# EAGLE board gd_new_combo (EAGLE 7.2.0)
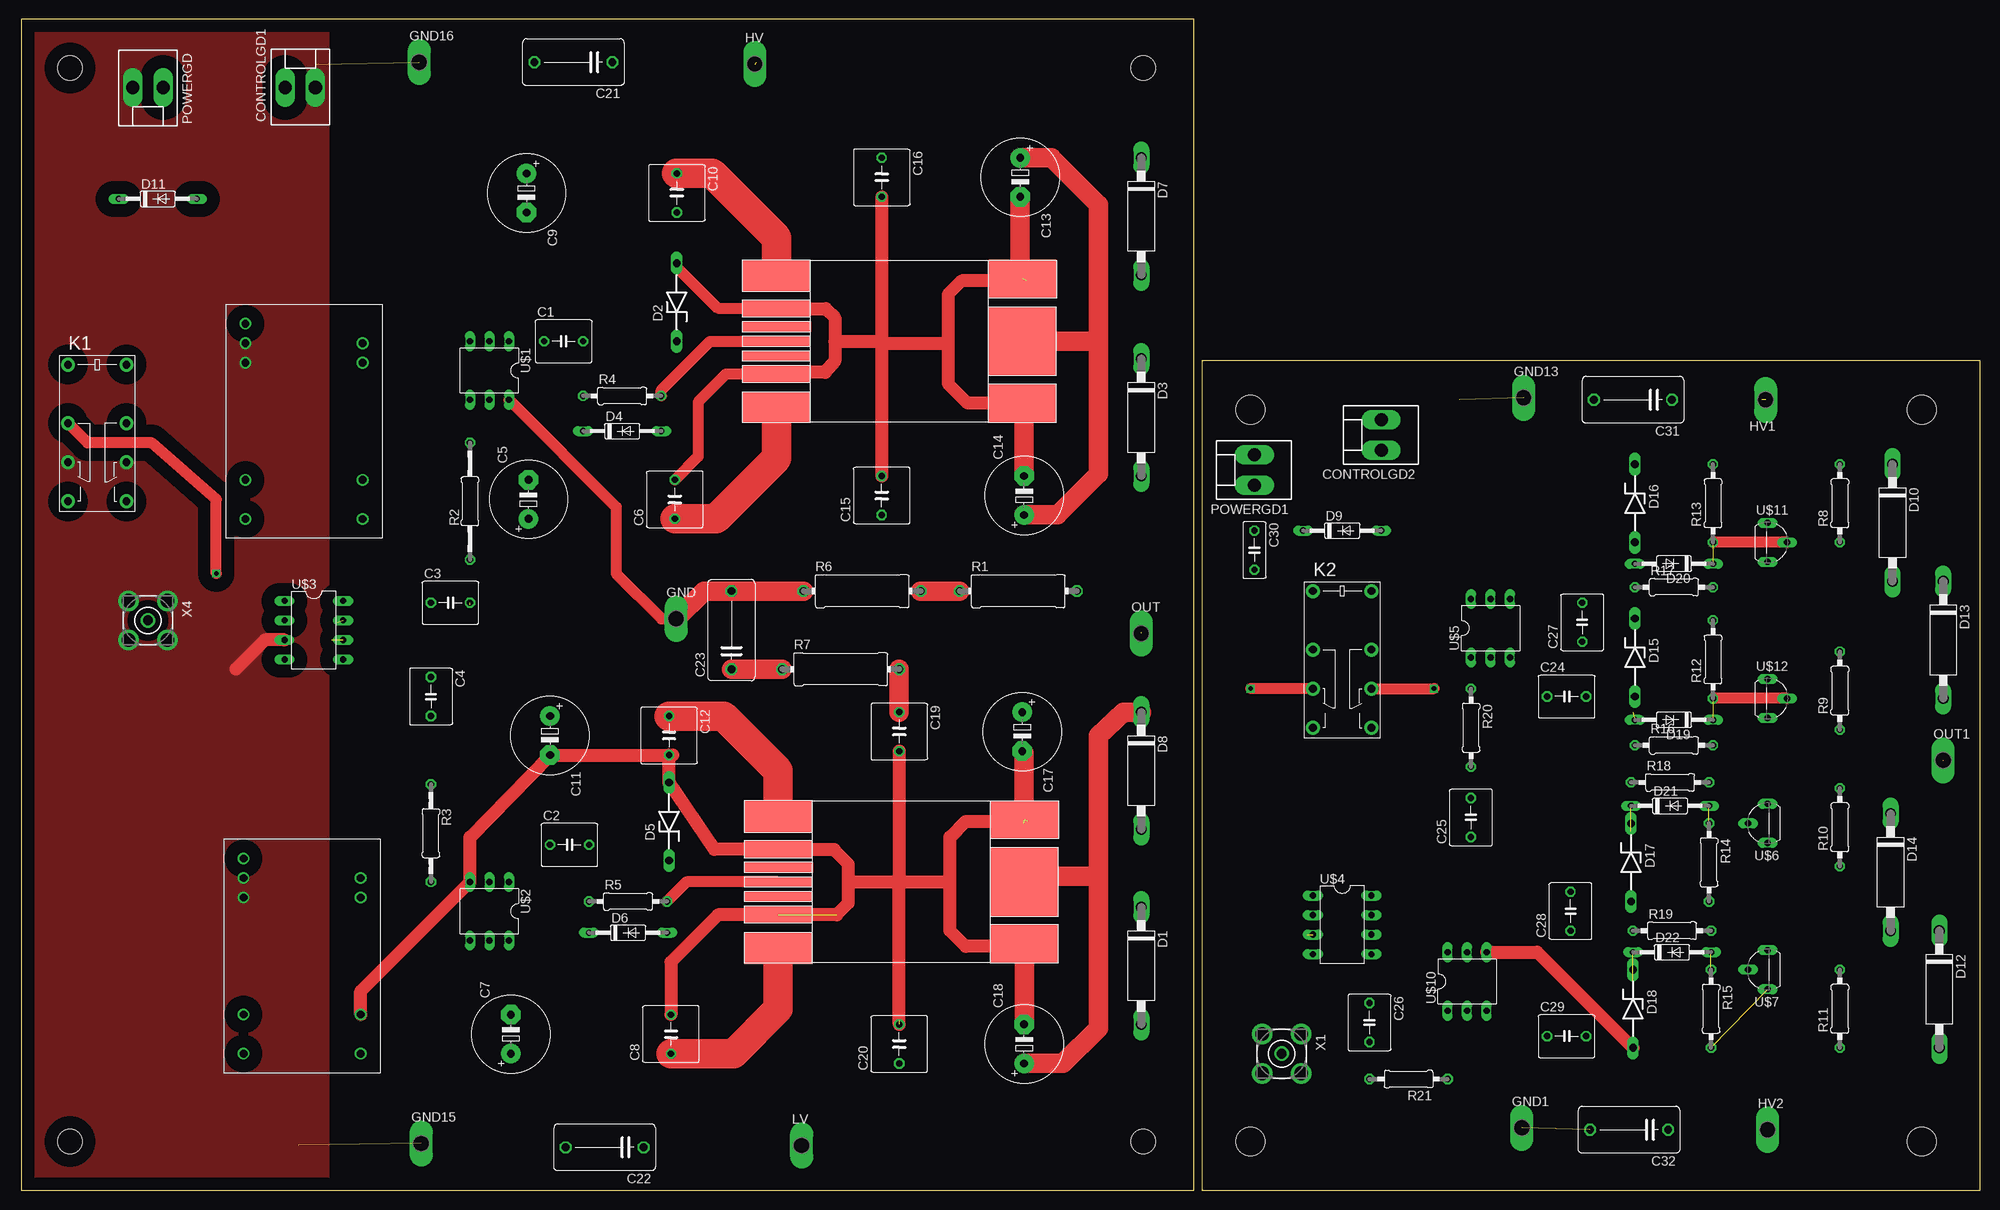
[diagram p0: board, top side]
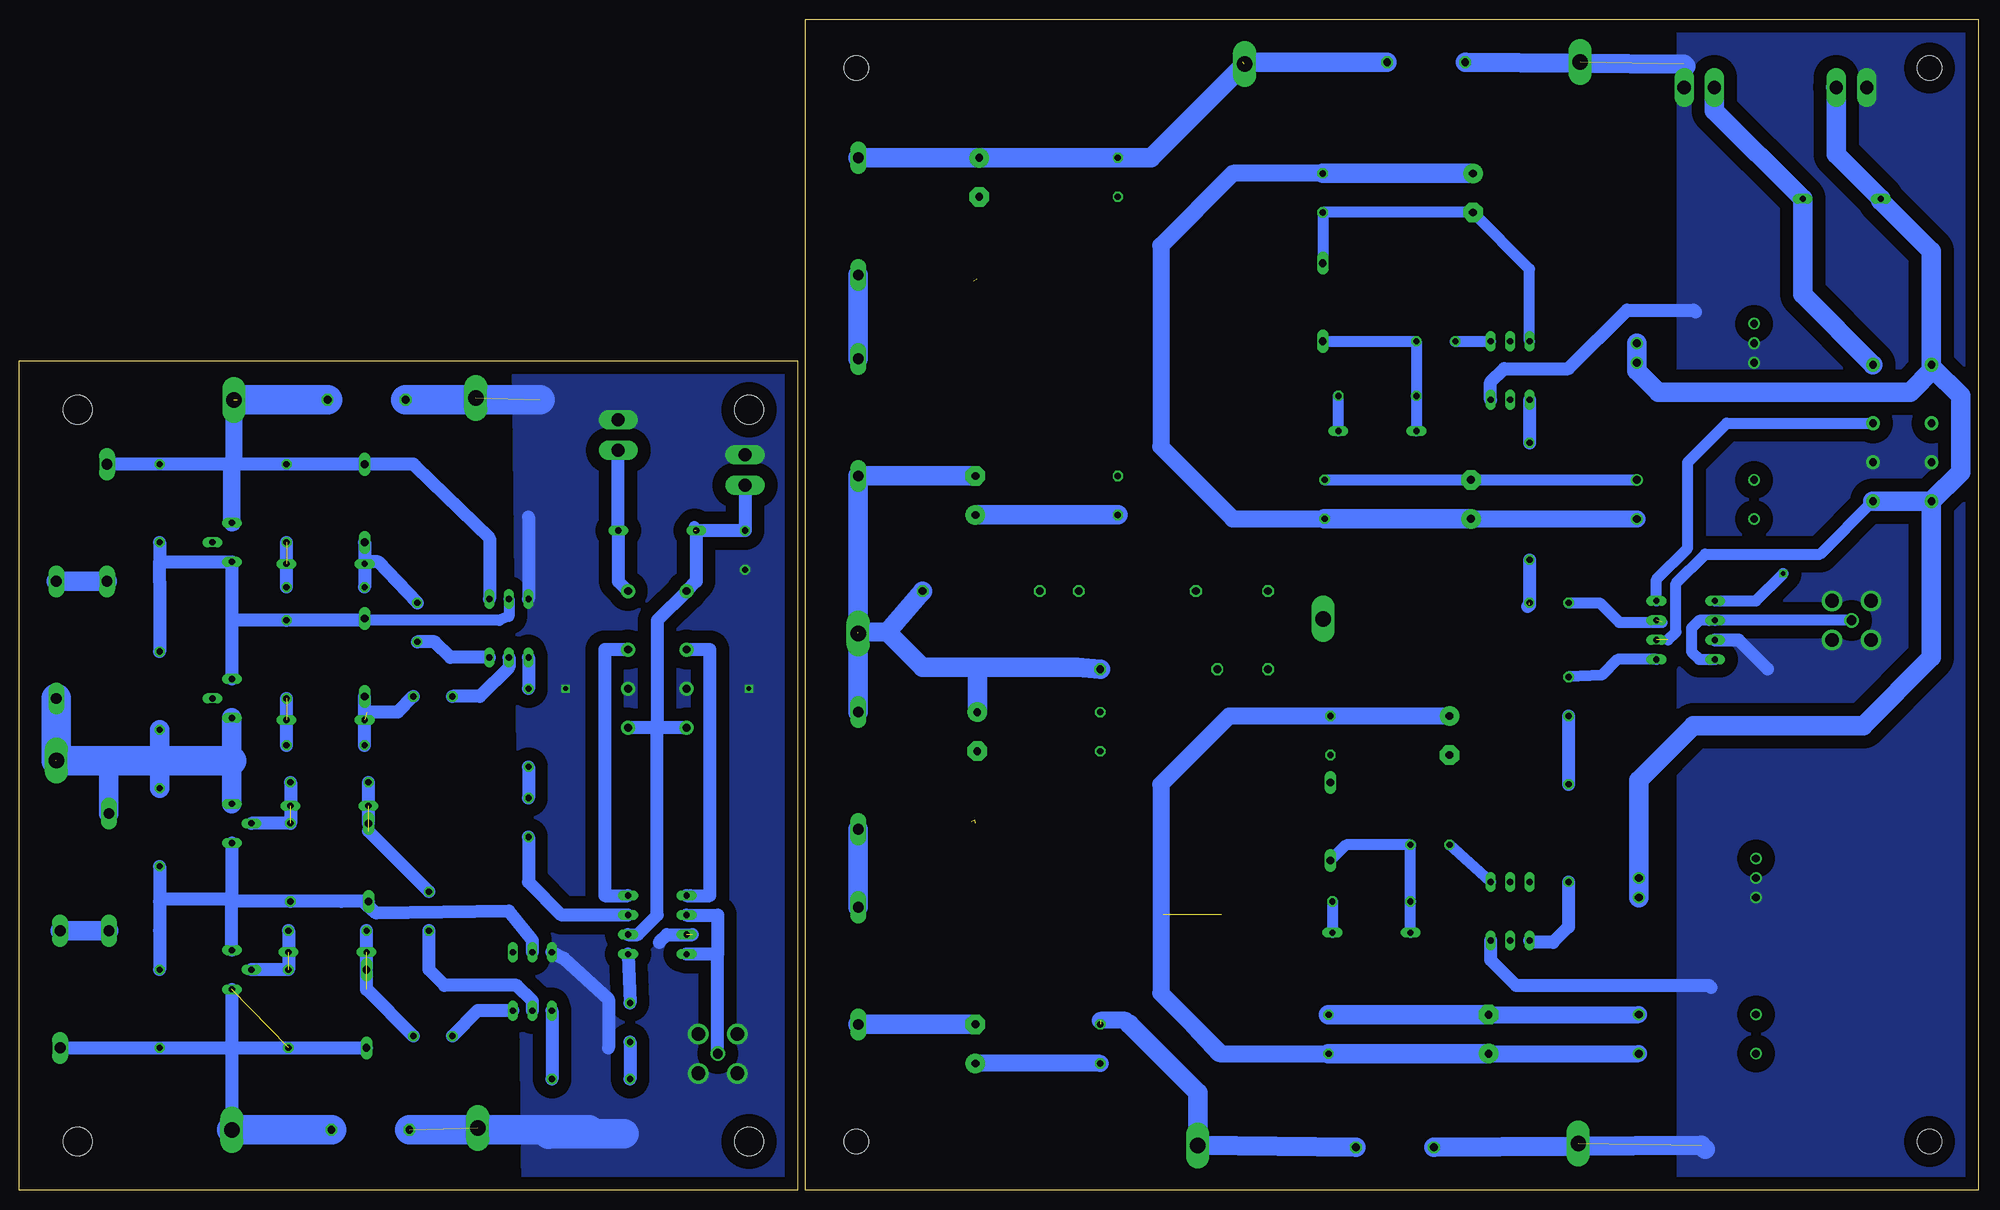
[diagram p1: board, bottom side, seen from below]

Size 255.02 x 152.4 mm. Coordinates in mm from the lower left corner, seen from the top.
Outline: 0,0 152.65,0 152.65,152.4 0,152.4 0,0
Outline: 153.67,0 255.02,0 255.02,107.95 153.67,107.95 153.67,0
Copper layers (1*16): Top 0.035mm / dielectric 1.5mm / Bottom 0.035mm
Design rules "default": minimum track width 10mil, minimum drill 24mil, track to track 8mil, track to pad 8mil, pad to pad 8mil, via to via 8mil, smd to smd 8mil, copper to edge 40mil, drill to drill 8mil, minimum pad ring 10mil, minimum via ring 8mil, stop-mask expansion 4mil, vias tented up to drill 0mil, thermal gap 10mil
Holes 3.2 mm at 146.05,146.05 146.05,6.35 6.35,6.35 6.35,146.05 146.05,146.05 146.05,6.35 6.35,6.35 6.35,146.05
Holes 3.8 mm at 247.4,101.6 247.4,6.35 160.02,6.35 160.02,101.6 247.4,101.6 247.4,6.35 160.02,6.35 160.02,101.6

## Footprints (pad centres in the part's own frame; a part is rotated, then mirrored left to right if it is on the bottom)
C050-055X075 = drill 0.813 octagon: 1 -2.54,0; 2 2.54,0
E5-10,5 = drill 1.016 pad 2.54: + -2.54,0 | drill 1.016 pad 2.54 octagon: - 2.54,0
C050-075X075 = drill 0.813 octagon: 1 -2.54,0; 2 2.54,0
C102-064X133 = drill 1.016 octagon: 1 -5.08,0; 2 5.08,0
C050-030X075 = drill 0.813 octagon: 1 -2.54,0; 2 2.54,0
KK-156-2 = drill 1.7 pad 2.184 long: 1 -1.98,0; 2 1.98,0
C1702-15 = drill 1.397 long: A 7.62,0; C -7.62,0
ZDIO-10 = drill 1 long: A 5.08,0; C -5.08,0
DO35-10 = drill 0.813 long: A 5.08,0; C -5.08,0
NCS = drill 1: P$1 0,0; P$2 2.54,0; P$3 5.08,0; P$4 20.32,0; P$5 25.4,0; P$6 25.4,15.24; P$7 20.32,15.24; P$8 5.08,15.24; P$9 2.54,15.24
P1-20Y = drill 2.007 pad 2.54 long: TP 0,0
G5V-2 = drill 1 pad 1.8: 1 -8.89,-3.81; 4 -1.27,-3.81; 6 3.81,-3.81; 8 8.89,-3.81; 9 8.89,3.81; 11 3.81,3.81; 13 -1.27,3.81; 16 -8.89,3.81
0414/15 = drill 1.016 octagon: 1 -7.62,0; 2 7.62,0
0207/15 = drill 0.813 octagon: 1 -7.62,0; 2 7.62,0
0207/12 = drill 0.813 octagon: 1 -6.35,0; 2 6.35,0
0207/10 = drill 0.813 octagon: 1 -5.08,0; 2 5.08,0
DIL06 = drill 0.813 long: 1 -2.54,-3.81; 2 0,-3.81; 3 2.54,-3.81; 4 2.54,3.81; 5 0,3.81; 6 -2.54,3.81
DIL08 = drill 0.813 long: 1 -3.81,-3.81; 2 -1.27,-3.81; 3 1.27,-3.81; 4 3.81,-3.81; 5 3.81,3.81; 6 1.27,3.81; 7 -1.27,3.81; 8 -3.81,3.81
TO92L = drill 0.813 long: 1 0,-2.54; 2 2.54,0; 3 0,2.54
IXZ631DF12N100 = smd 8.89 x 4.064: P$1 -16.002,8.534; P$7 -15.977,-8.585 | smd 8.89 x 2.159: P$2 -15.977,4.242; P$6 -16.027,-4.293 | smd 8.89 x 1.27: P$3 -15.951,1.88; P$4 -16.078,0; P$5 -16.027,-1.854 | smd 8.89 x 4.953: P$8 16.053,-8.052; P$10 16.053,8.103 | smd 8.89 x 8.89: P$9 16.015,-0.013
BU-SMA-V = drill 1.27: 1 0,0 | drill 1.778: 2 -2.55,2.55; 3 2.55,2.55; 4 2.55,-2.55; 5 -2.55,-2.55

## Placement (x,y rotation side)
C1  [C050-055X075]  70.61,110.49 0 top
C2  [C050-055X075]  71.37,44.96 0 top
C3  [C050-055X075]  55.88,76.45 0 top
C4  [C050-055X075]  53.34,64.26 270 top
C5  [E5-10,5]  66.04,89.92 90 top
C6  [C050-075X075]  85.09,89.92 90 top
C7  [E5-10,5]  63.75,20.32 90 top
C8  [C050-075X075]  84.58,20.32 90 top
C9  [E5-10,5]  65.79,129.79 270 top
C10  [C050-075X075]  85.34,129.79 270 top
C11  [E5-10,5]  68.83,59.18 270 top
C12  [C050-075X075]  84.33,59.18 270 top
C13  [E5-10,5]  130.05,131.83 270 top
C14  [E5-10,5]  130.56,90.42 90 top
C15  [C050-075X075]  112.01,90.42 90 top
C16  [C050-075X075]  112.01,131.83 270 top
C17  [E5-10,5]  130.3,59.69 270 top
C18  [E5-10,5]  130.56,19.05 90 top
C19  [C050-075X075]  114.3,59.69 270 top
C20  [C050-075X075]  114.3,19.05 90 top
C21  [C102-064X133]  71.88,146.81 180 top
C22  [C102-064X133]  75.95,5.59 180 top
C23  [C102-064X133]  92.46,72.9 90 top
C24  .22u  [C050-055X075]  201.17,64.26 0 top
C25  .22u  [C050-055X075]  188.72,48.51 90 top
C26  .22u  [C050-055X075]  175.51,21.84 270 top
C27  .22u  [C050-055X075]  203.2,73.91 90 top
C28  .22u  [C050-055X075]  201.68,36.32 90 top
C29  .22u  [C050-055X075]  201.17,20.07 0 top
C30  [C050-030X075]  160.53,83.31 270 top
C31  10p  [C102-064X133]  209.8,102.87 180 top
C32  10p  [C102-064X133]  209.3,7.87 180 top
CONTROLGD1  [KK-156-2]  36.32,143.51 0 top
CONTROLGD2  [KK-156-2]  177.04,98.3 90 top
D1  P6KEXXA  [C1702-15]  145.8,29.21 270 top
D2  4742  [ZDIO-10]  85.34,115.57 90 top
D3  P6KEXXA  [C1702-15]  145.8,100.58 270 top
D4  1N4148DO35-10  [DO35-10]  78.23,98.81 0 top
D5  4742  [ZDIO-10]  84.33,48.01 90 top
D6  1N4148DO35-10  [DO35-10]  78.99,33.53 0 top
D7  P6KEXXA  [C1702-15]  145.8,126.75 270 top
D8  P6KEXXA  [C1702-15]  145.8,54.61 270 top
D9  1N4148DO35-10  [DO35-10]  171.96,85.85 0 top
D10  P6KEXXA  [C1702-15]  243.59,86.87 270 top
D11  1N4148DO35-10  [DO35-10]  17.78,129.03 0 top
D12  P6KEXXA  [C1702-15]  249.68,26.16 270 top
D13  P6KEXXA  [C1702-15]  250.19,71.63 270 top
D14  P6KEXXA  [C1702-15]  243.33,41.4 270 top
D15  4742  [ZDIO-10]  210.06,69.34 270 top
D16  4742  [ZDIO-10]  210.06,89.41 270 top
D17  4742  [ZDIO-10]  209.55,42.67 270 top
D18  4742  [ZDIO-10]  209.8,23.62 270 top
D19  1N4148DO35-10  [DO35-10]  215.14,61.21 180 top
D20  1N4148DO35-10  [DO35-10]  215.14,81.53 180 top
D21  1N4148DO35-10  [DO35-10]  214.63,50.04 0 top
D22  1N4148DO35-10  [DO35-10]  214.88,30.99 0 top
DC1  [NCS]  29.21,112.78 270 top
DC2  [NCS]  28.96,43.18 270 top
GND  TPPAD1-20Y  [P1-20Y]  85.27,74.37 0 top
GND1  TPPAD1-20Y  [P1-20Y]  195.33,8.13 0 top
GND13  TPPAD1-20Y  [P1-20Y]  195.58,103.12 0 top
GND15  TPPAD1-20Y  [P1-20Y]  52.07,6.1 0 top
GND16  TPPAD1-20Y  [P1-20Y]  51.82,146.81 0 top
HV  TPPAD1-20Y  [P1-20Y]  95.5,146.56 0 top
HV1  TPPAD1-20Y  [P1-20Y]  227.08,102.87 180 top
HV2  TPPAD1-20Y  [P1-20Y]  227.33,7.87 0 top
K1  G5V-2  [G5V-2]  9.91,98.55 270 top
K2  G5V-2  [G5V-2]  171.96,69.09 270 top
LV  TPPAD1-20Y  [P1-20Y]  101.6,5.84 0 top
OUT  TPPAD1-20Y  [P1-20Y]  145.8,72.47 0 top
OUT1  TPPAD1-20Y  [P1-20Y]  250.19,55.96 0 top
POWERGD  [KK-156-2]  16.51,143.51 180 top
POWERGD1  [KK-156-2]  160.53,93.73 90 top
R1  [0414/15]  129.79,77.98 0 top
R2  [0207/15]  58.42,89.66 90 top
R3  [0207/12]  53.34,46.48 270 top
R4  [0207/10]  78.23,103.38 0 top
R5  [0207/10]  78.99,37.59 0 top
R6  [0414/15]  109.47,77.98 0 top
R7  [0414/15]  106.68,67.82 0 top
R8  1M  [0207/10]  236.73,89.41 90 top
R9  1M  [0207/10]  236.73,65.02 90 top
R10  1M  [0207/10]  236.73,47.24 90 top
R11  1M  [0207/10]  236.73,23.62 90 top
R12  50k  [0207/10]  220.22,69.09 90 top
R13  50k  [0207/10]  220.22,89.41 90 top
R14  50k  [0207/10]  219.71,42.67 270 top
R15  50k  [0207/10]  219.96,23.62 270 top
R16  70  [0207/10]  215.14,57.91 0 top
R17  70  [0207/10]  215.14,78.49 0 top
R18  70  [0207/10]  214.63,53.09 0 top
R19  70  [0207/10]  214.88,33.78 0 top
R20  70  [0207/10]  188.72,60.2 270 top
R21  1M  [0207/10]  180.59,14.48 180 top
U$1  DA-2319  [DIL06]  60.96,106.68 180 top
U$2  DA-2319  [DIL06]  60.96,36.32 180 top
U$3  UCC27425  [DIL08]  38.1,72.9 270 top
U$4  UCC27425  [DIL08]  171.96,34.54 270 top
U$5  DA-2320  [DIL06]  191.26,73.15 0 top
U$6  VN0550L  [TO92L]  227.33,47.75 180 top
U$7  VN0550L  [TO92L]  227.33,28.7 180 top
U$8  IXZ631DF12N100  [IXZ631DF12N100]  114.3,110.49 0 top
U$9  IXZ631DF12N100  [IXZ631DF12N100]  114.55,40.13 0 top
U$10  DA-2320  [DIL06]  188.21,27.18 0 top
U$11  VP0550L  [TO92L]  227.33,84.33 0 top
U$12  VP0550L  [TO92L]  227.33,64.01 0 top
X1  BU-SMA-V  [BU-SMA-V]  164.08,17.78 270 top
X4  BU-SMA-V  [BU-SMA-V]  16.51,74.17 270 top

## Library data of the parts
C1-C4 C6 C8 C10 C12 C15 C16 C19 C20 C24-C29 C31 C32 R1-R7 = resistor
C5 C7 C9 C11 C13 C14 C17 C18 C21-C23 C30 R8-R21 = rcl
CONTROLGD1 CONTROLGD2 POWERGD POWERGD1 = con-molex; OC_FARNELL: unknown; OC_NEWARK: unknown
D1-D22 = diode
DC1 DC2 = dc-dc-converter
GND GND1 GND13 GND15 GND16 HV HV1 HV2 LV OUT OUT1 = testpad
K1 K2 = relay; MPN: G5V-2 5DC; OC_FARNELL: 9949488; OC_NEWARK: 78K5703
U$1 U$2 U$5 U$10 = trafo
U$3 U$4 = texas
U$6 U$7 U$11 U$12 = transistor-fet
U$8 U$9 = hvsw
X1 X4 = con-coax; OC_FARNELL: unknown; OC_NEWARK: unknown

## Nets
+12V: D11.C DC1.P$8 DC1.P$9 DC2.P$8 DC2.P$9 K1.1 K1.8 K1.9 POWERGD.1 U$3.6
+15V: C30.1 D9.C K2.1 K2.8 K2.9 POWERGD1.1 U$4.6
ENSW: CONTROLGD1.1 D11.A K1.16
ENSW1: CONTROLGD2.1 D9.A K2.16
GD_HI: D4.A R4.2 U$8.P$4
GD_LO: D6.A R5.2 U$9.P$4
GND: C21.2 C22.2 C23.2 CONTROLGD1.2 DC1.P$2 DC1.P$3 DC2.P$2 DC2.P$3 GND15.TP GND16.TP GND.TP K1.6 K1.11 POWERGD.2 R6.1 U$1.6 U$2.6 U$3.3 X4.2 X4.3 X4.4 X4.5
GND2: C30.2 C31.2 C32.2 CONTROLGD2.2 GND1.TP GND13.TP K2.6 K2.11 POWERGD1.2 U$4.3 U$5.6 U$10.6 X1.2 X1.3 X1.4 X1.5
N$1: U$3.2 U$3.4 X4.1
N$2: C3.1 U$3.7
N$3: R2.2 U$1.4
N$4: C4.1 U$3.5
N$5: R3.2 U$2.4
N$6: C4.2 R3.1
N$7: C5.+ C6.1 C9.+ C10.1 DC1.P$6 U$8.P$1 U$8.P$7
N$8: C7.+ C8.1 C11.+ C12.1 DC2.P$6 U$9.P$1 U$9.P$7
N$9: D3.C D7.A
N$10: C1.1 U$1.1
N$11: C2.1 U$2.1
N$12: R1.1 R6.2
N$13: C23.1 R7.1
N$14: K1.4 U$3.1
N$15: K1.13 U$3.8
N$16: C3.2 R2.1
N$17: C13.+ C14.+ C15.1 C16.1 C21.1 D7.C HV.TP U$8.P$9
N$18: D1.C D8.A
N$19: C7.- C8.2 C11.- C12.2 C17.- C18.- C19.2 C20.2 C22.1 D1.A D5.A DC2.P$7 LV.TP U$2.3 U$9.P$2 U$9.P$6 U$9.P$8 U$9.P$10
N$20: C1.2 D2.C D4.C R4.1
N$21: C2.2 D5.C D6.C R5.1
N$22: U$4.2 U$4.4 X1.1
N$23: C25.1 U$4.7
N$24: C26.1 U$4.5
N$25: K2.4 U$4.1
N$26: K2.13 U$4.8
N$27: C24.1 U$5.2
N$28: C27.1 U$5.3
N$29: C28.1 U$10.2
N$30: C29.1 U$10.3
N$32: C28.2 D17.C D21.C R18.1
N$33: C29.2 D18.C D22.C R19.1
N$35: C27.2 D16.A D20.A R17.1
N$36: C31.1 D10.C D16.C HV1.TP R8.2 R13.2 U$5.4 U$11.3
N$37: D13.A D14.C OUT1.TP R9.1 R10.2 U$6.1 U$12.1
N$38: U$10.5
N$40: D17.A R10.1 R11.2 R14.2 U$6.3 U$7.1
N$41: D15.C R8.1 R9.2 R12.2 U$5.5 U$11.1 U$12.3
N$43: D19.C R12.1 R16.2 U$12.2
N$44: C24.2 D15.A D19.A R16.1
N$45: D22.A R15.1 R19.2 U$7.2
N$46: D20.C R13.1 R17.2 U$11.2
N$47: R20.1 U$5.1
N$48: R21.1 U$10.1
N$49: C25.2 R20.2
N$50: C26.2 R21.2
N$51: C32.1 D12.A D18.A HV2.TP R11.1 R15.2 U$7.3 U$10.4
N$52: D10.A D13.C
N$53: D12.C D14.A
N$251: D21.A R14.1 R18.2 U$6.2
OUT: C5.- C6.2 C9.- C10.2 C13.- C14.- C15.2 C16.2 C17.+ C18.+ C19.1 C20.1 D2.A D3.A D8.C DC1.P$7 OUT.TP R1.2 R7.2 U$1.3 U$8.P$2 U$8.P$6 U$8.P$8 U$8.P$10 U$9.P$9

## Tracks (layer width: path | path; a pad name or v marks a point on that pad's centre or on a via)
+12V  (1 unrouted)
  Bottom 1.422: 40.39,71.63 39.37,72.64 39.37,78.99 35.56,82.8 20.57,82.8 K1.9
  Bottom 2.54: 5.84,106.93 6.1,107.19 K1.1 6.1,122.17 12.7,128.78 D11.C 18.49,134.82 POWERGD.1 18.54,143.56 | 5.84,106.93 2.29,103.38 2.29,93.47 K1.8 | K1.8 K1.9 | DC1.P$9 DC1.P$8 44.45,106.68 41.66,103.89 8.89,103.89 5.84,106.93 | DC2.P$8 DC2.P$9 44.2,53.34 37.08,60.45 14.99,60.45 6.1,69.34 K1.8
+15V  (1 unrouted)
  Bottom 1.422: 167.13,85.85 167.13,86.36
  Bottom 1.676: D9.C 166.88,79.25 K2.1 171.96,74.17 171.96,60.2 | 171.96,60.2 171.96,35.81 174.5,33.27 U$4.6 | 171.96,60.2 K2.9 | K2.8 171.96,60.2 | POWERGD1.1 C30.1 167.13,85.85
ENSW
  Bottom 2.54: CONTROLGD1.1 34.34,140.51 D11.A 22.86,116.59 K1.16
ENSW1
  Bottom 1.676: CONTROLGD2.1 D9.A 177.04,79.25 K2.16
GD_HI
  Top 1.422: R4.2 83.31,104.14 89.66,110.49 U$8.P$4
  Bottom 1.422: D4.A R4.2
GD_LO
  Top 1.422: U$9.P$4 86.61,40.13 R5.2
  Bottom 1.422: R5.2 D6.A
GND  (2 unrouted)
  Top 1.422: U$1.6 77.47,88.9 77.47,80.26 83.36,74.37 GND.TP
  Top 1.676: U$3.3 31.75,71.63 27.94,67.82
  Top 2.54: GND.TP 88.88,77.98 C23.2 R6.1
  Bottom 1.676: U$2.6 63.5,29.97 60.2,26.67 35.05,26.67 34.8,26.42 | U$3.3 31.24,71.63 27.43,67.82 | U$1.6 63.5,105.16 61.72,106.93 53.34,106.93 45.72,114.55 37.08,114.55 36.83,114.3
  Bottom 2.54: C21.2 38.35,146.56 38.1,146.3 | C22.2 36.07,5.84 35.56,5.33
  pour Bottom (isolate 1.676, no thermals): 0.25,152.4 39.12,152.15 39.12,-0.25 0.25,0
  pour Top (isolate 1.676, no thermals): 0.25,152.15 39.88,151.89 39.88,-0.25 0.25,0
GND2  (via drill 0.6)  (3 unrouted)
  Top 1.422: K2.11 v183.9,65.28 | K2.6 v160.02,65.28
  Bottom 1.676: 188.72,87.63 U$5.6 | U$10.6 184.15,30.23 178.31,24.89 178.31,18.54 | 171.7,32.26 170.69,33.27 167.39,33.27
  Bottom 3.81: 186.13,7.32 180.85,7.34 | 180.85,7.34 176.28,7.37 | C31.2 187.2,102.87 | C32.2 180.85,7.87 180.85,7.34
  pour Bottom (isolate 1.676, no thermals): 153.92,107.7 190.75,107.7 189.48,0 153.92,0
N$1
  Bottom 1.422: X4.1 U$3.2 | U$3.2 35.05,74.17 | U$3.2 36.32,74.17 37.34,73.15 37.34,70.1 36.32,69.09 U$3.4
N$2  (1 unrouted)
  Bottom 1.422: C3.1 49.28,76.45 46.74,73.91 41.15,73.91
N$3
  Bottom 1.676: U$1.4 R2.2
N$4
  Bottom 1.422: U$3.5 46.99,69.09 49.02,67.06 C4.1
N$5
  Bottom 1.676: R3.2 53.34,34.29 55.37,32.26 58.17,32.26 U$2.4
N$6
  Bottom 1.676: C4.2 R3.1
N$7
  Top 3.81: C6.1 90.42,87.38 98.3,95.25 98.3,101.88 U$8.P$7 | U$8.P$1 98.3,123.95 89.92,132.33 C10.1
  Bottom 2.184: C5.+ DC1.P$6 | C10.1 97.03,132.33 106.43,122.94 106.43,96.77 97.03,87.38 84.07,87.38
  Bottom 2.54: C9.+ C10.1 | C5.+ 84.07,87.38 C6.1
N$8
  Top 3.81: C8.1 92.71,17.78 98.55,23.62 98.55,31.52 U$9.P$7 | U$9.P$1 98.55,54.61 91.44,61.72 C12.1
  Bottom 2.184: C11.+ C12.1 97.54,61.72 106.43,52.83 106.43,25.65 102.11,21.34 | C7.+ DC2.P$6 | 98.81,18.03 102.11,21.34 | 102.11,21.34 98.81,17.78 84.07,17.78
  Bottom 2.54: C8.1 84.07,17.78 C7.+
N$9
  Bottom 2.54: D7.A D3.C
N$10
  Bottom 1.422: C1.1 U$1.1
N$11
  Bottom 1.422: U$2.1 C2.1
N$12
  Top 2.54: R6.2 R1.1
N$13
  Top 2.54: C23.1 R7.1
N$14  (via drill 0.6)
  Top 1.422: v25.4,80.26 25.4,89.92 17.02,97.28 8.64,97.28 K1.4
  Bottom 1.422: U$3.1 28.96,76.71 v25.4,80.26
N$15
  Bottom 1.422: U$3.8 41.91,79.5 37.85,83.57 37.85,94.74 32.77,99.82 K1.13
N$16  (1 unrouted)
  Bottom 1.676: R2.1 58.42,76.2 58.67,75.95
N$17  (1 unrouted)
  Top 2.54: C14.+ 134.87,87.88 140.21,93.22 140.21,111 | 140.21,111 140.21,128.27 134.11,134.37 C13.+ | U$8.P$9 139.69,110.48 140.21,111
  Bottom 2.54: D7.C C13.+ C16.1 107.7,134.37 HV.TP | C15.1 C14.+ | C21.1 95.76,146.81
N$18
  Bottom 2.54: D8.A D1.C
N$19  (4 unrouted)
  Top 1.422: 105.74,44.37 105.41,44.37 | U$9.P$8 130.28,31.75 | C17.- 130.56,56.9 | C18.- 130.61,21.64
  Top 1.676: C12.2 D5.A 90.25,44.37 U$9.P$2 105.41,44.37 105.84,44.37 | 84.84,56.64 C11.- 58.42,45.97 U$2.3 44.2,25.91 DC2.P$7 | C8.2 84.58,29.72 90.7,35.84 106.15,35.84 107.7,37.39 107.7,40.13 | 107.7,40.13 107.7,42.42 105.74,44.37 | 130.28,31.75 122.94,31.75 120.9,33.78 120.9,40.13 | 120.9,40.13 120.9,45.97 122.94,48.01 131.06,48.01 | 107.7,40.13 114.3,40.13 | 114.3,40.13 120.9,40.13 | C20.2 114.3,40.13 | C19.2 114.3,40.13
  Top 2.54: 130.56,56.9 130.56,47.75 | 130.61,21.64 U$9.P$8
  Bottom 2.184: C7.- DC2.P$7 | 110.49,21.59 111,22.1 114.3,22.1
  Bottom 2.54: C22.1 LV.TP 101.6,12.7 110.49,21.59 | C7.- C8.2 | D1.A C18.-
N$20
  Bottom 1.422: D2.C C1.2 R4.1 D4.C
N$21
  Bottom 1.422: D6.C R5.1 C2.2 82.3,44.96 D5.C
N$22
  Bottom 1.676: X1.1 164.08,30.73 | U$4.2 164.08,35.81 164.08,30.73 | 164.08,30.73 U$4.4
N$23
  Bottom 1.676: U$4.7 184.4,35.81 188.72,40.13 C25.1
N$24
  Bottom 1.676: U$4.5 C26.1
N$25
  Bottom 1.676: 167.64,38.35 U$4.1 165.1,38.35 165.1,70.36 K2.4
N$26
  Bottom 1.676: K2.13 178.82,70.36 178.82,38.35 U$4.8
N$27
  Bottom 1.676: U$5.2 191.26,68.07 195.07,64.26 C24.1
N$28
  Bottom 1.676: U$5.3 198.88,69.34 200.91,71.37 C27.1
N$29
  Bottom 1.676: U$10.2 188.21,24.64 190.25,26.67 199.64,26.67 201.68,28.7 C28.1
N$30
  Bottom 1.676: U$10.3 195.33,23.37 C29.1
N$32  (2 unrouted)
  Bottom 1.676: C28.2 209.55,46.74 | D17.C R18.1
N$33  (2 unrouted)
  Bottom 1.676: C29.2 209.8,26.16 R19.1
N$35
  Bottom 1.676: C27.2 208.28,81.79 209.8,81.79 D20.A | D20.A R17.1 | D16.A D20.A
N$36  (1 unrouted)
  Bottom 1.676: 227.08,94.49 227.08,86.61 U$11.3 | 227.08,94.49 227.35,94.48 227.09,94.23 227.08,94.49 | 227.08,94.49 R8.2 D10.C | U$5.4 193.8,84.84 203.45,94.23 203.71,94.49 D16.C R13.2 227.08,94.49
  Bottom 2.184: U$11.3 227.35,94.48 | HV1.TP 227.08,94.49
  Bottom 3.81: C31.1 226.57,102.87
N$37  (1 unrouted)
  Bottom 2.54: U$12.1 227.33,55.88 U$6.1 | R10.2 236.73,55.88 R9.1 | D14.C 243.33,55.88
  Bottom 3.81: D13.A 250.19,55.88 243.33,55.88 236.73,55.88 227.33,55.88
N$38
  Bottom 1.676: U$10.5 188.21,32.51 191.26,36.32 208.53,36.07 210.31,37.59 213.11,37.59
N$40
  Bottom 1.676: U$6.3 227.33,37.59 | R10.1 236.73,37.59 | 236.73,37.59 236.73,33.78 R11.2 | D17.A R14.2 227.33,37.59 | U$7.1 227.33,37.59 | 227.33,37.59 227.08,37.85 236.47,37.85 236.73,37.59
N$41
  Bottom 1.422: U$5.5 191.26,74.68 192.53,74.17 R12.2
  Bottom 1.676: 227.33,74.17 U$11.1 236.73,81.79 | 227.33,74.17 U$12.3 | 236.73,81.79 236.73,79.25 R9.2 | R8.1 236.73,81.79 | D15.C 210.31,74.17 R12.2 227.33,74.17
N$43  (1 unrouted)
  Top 1.422: U$12.2 R12.1
  Bottom 1.676: R16.2 R12.1
N$44  (1 unrouted)
  Bottom 1.676: C24.2 205.74,62.23 209.8,62.23 210.06,62.48 | 210.06,62.48 D15.A | R16.1 210.06,62.48
N$45  (1 unrouted)
  Bottom 1.676: R19.2 R15.1 U$7.2
N$46  (1 unrouted)
  Top 1.422: U$11.2 R13.1
  Bottom 1.676: R17.2 R13.1
N$47
  Bottom 1.676: U$5.1 R20.1
N$48
  Bottom 1.676: U$10.1 R21.1
N$49
  Bottom 1.676: R20.2 C25.2
N$50
  Bottom 1.676: C26.2 R21.2
N$51  (1 unrouted)
  Top 1.676: U$10.4 197.36,30.99 D18.A
  Bottom 1.676: D12.A R11.1 R15.2 D18.A | 227.33,7.62 HV2.TP U$7.3
  Bottom 3.81: HV2.TP C32.1
N$52
  Bottom 2.54: D10.A D13.C
N$53
  Bottom 2.54: D12.C D14.A
N$251  (1 unrouted)
  Bottom 1.676: R18.2 R14.1 U$6.2
OUT  (2 unrouted)
  Top 1.422: D2.A 85.34,120.14 90.68,114.81 98.25,114.81 U$8.P$2 | 98.5,106.43 U$8.P$6 91.72,106.2 88.14,102.62 88.14,95.5 C6.2 | 104.72,114.73 105.84,113.46 | 130.56,102.23 U$8.P$8 | 130.05,119.13 130.81,118.36 | 104.65,106.43 105.92,107.7 105.92,107.95 | 112.01,110.49 112.27,110.24 | 114.3,61.98 C19.1 | U$9.P$9 131.34,40.89
  Top 1.676: U$8.P$2 104.72,114.73 105.92,113.54 105.92,110.49 | 105.92,110.49 105.92,107.95 104.65,106.43 98.5,106.43 | U$8.P$8 123.19,102.44 120.65,104.98 120.65,110.24 | 130.81,118.36 122.43,118.36 120.65,116.59 120.65,110.24 | C16.2 112.01,110.49 | 112.01,110.49 C15.2 | 105.92,110.49 112.01,110.49 | 112.27,110.24 120.65,110.24
  Top 2.54: C14.- 130.56,102.23 | C13.- 130.05,119.13 | R7.2 C19.1 | 131.34,40.89 140.21,40.89 | 140.21,40.89 140.21,59.18 143.51,62.23 D8.C | 140.21,40.89 140.21,21.08 135.64,16.51 C18.+
  Bottom 1.422: U$1.3 58.42,119.89 C9.- C10.2 D2.A | C6.2 C5.- DC1.P$7 | 142.03,72.69 142,72.69
  Bottom 2.184: C20.1 C18.+
  Bottom 2.54: C14.- D3.A 145.8,72.64 142,72.69 R1.2 | R7.2 117.35,68.07 130.3,68.07 | 130.3,68.07 137.41,68.07 142.03,72.69 | C17.+ 130.3,68.07 | D8.C OUT.TP